# Altium PCB Widora-BIT3-NEO.PcbDoc
Units mil, origin at the board's own origin, x right, y up, seen from the top; angles counter-clockwise.
Board outline 3000 x 1400 mil, 2 copper layers (Top Layer, Bottom Layer), stack 56.8 mil thick; 76 components, 91 nets, 361 pads, 181 vias.
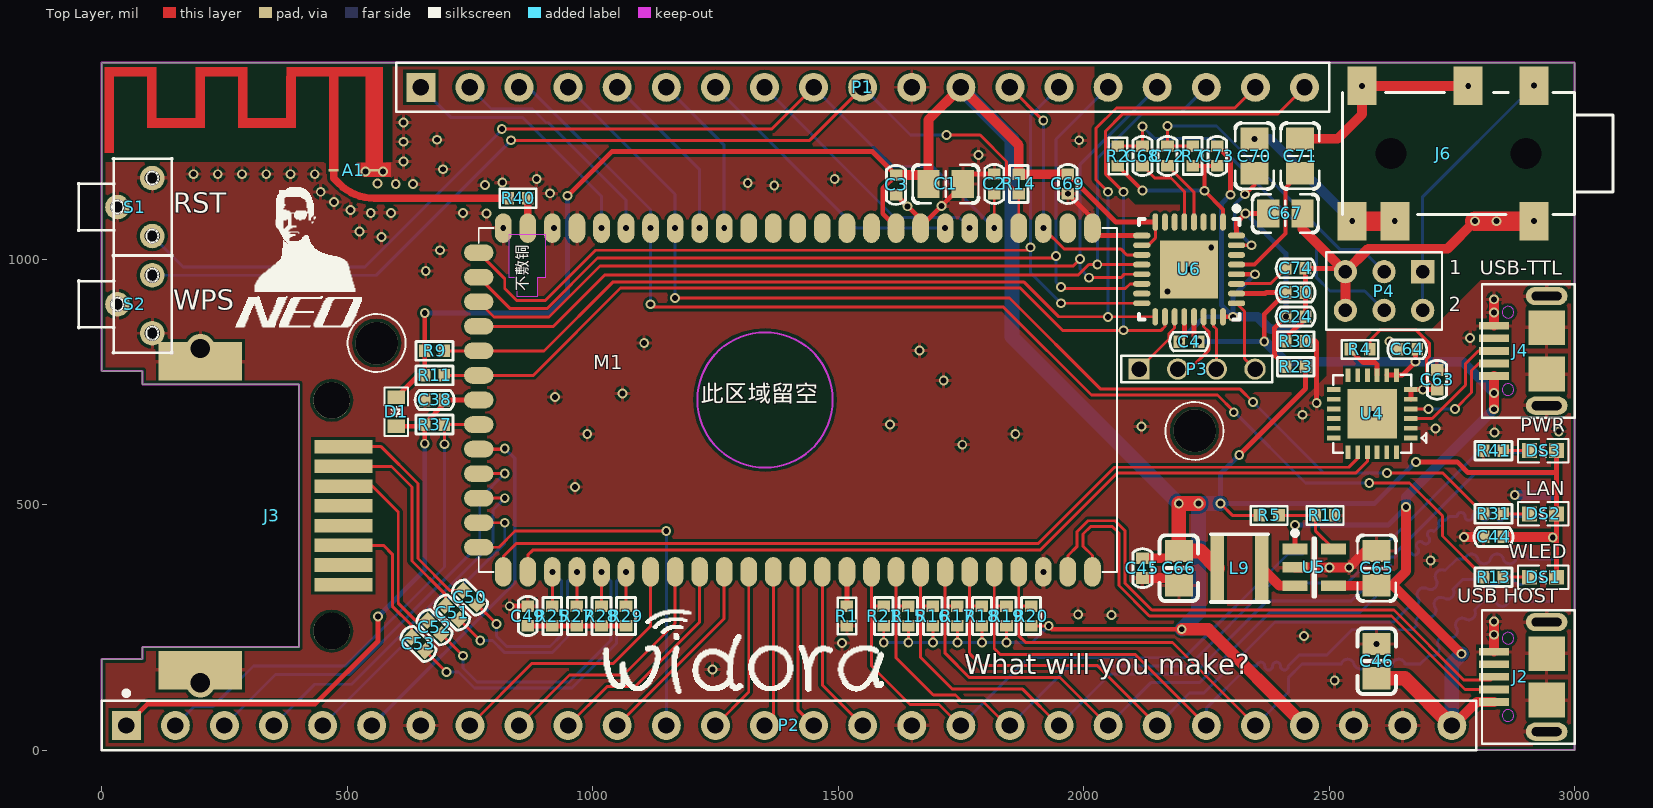
[diagram p0: Top Layer view]
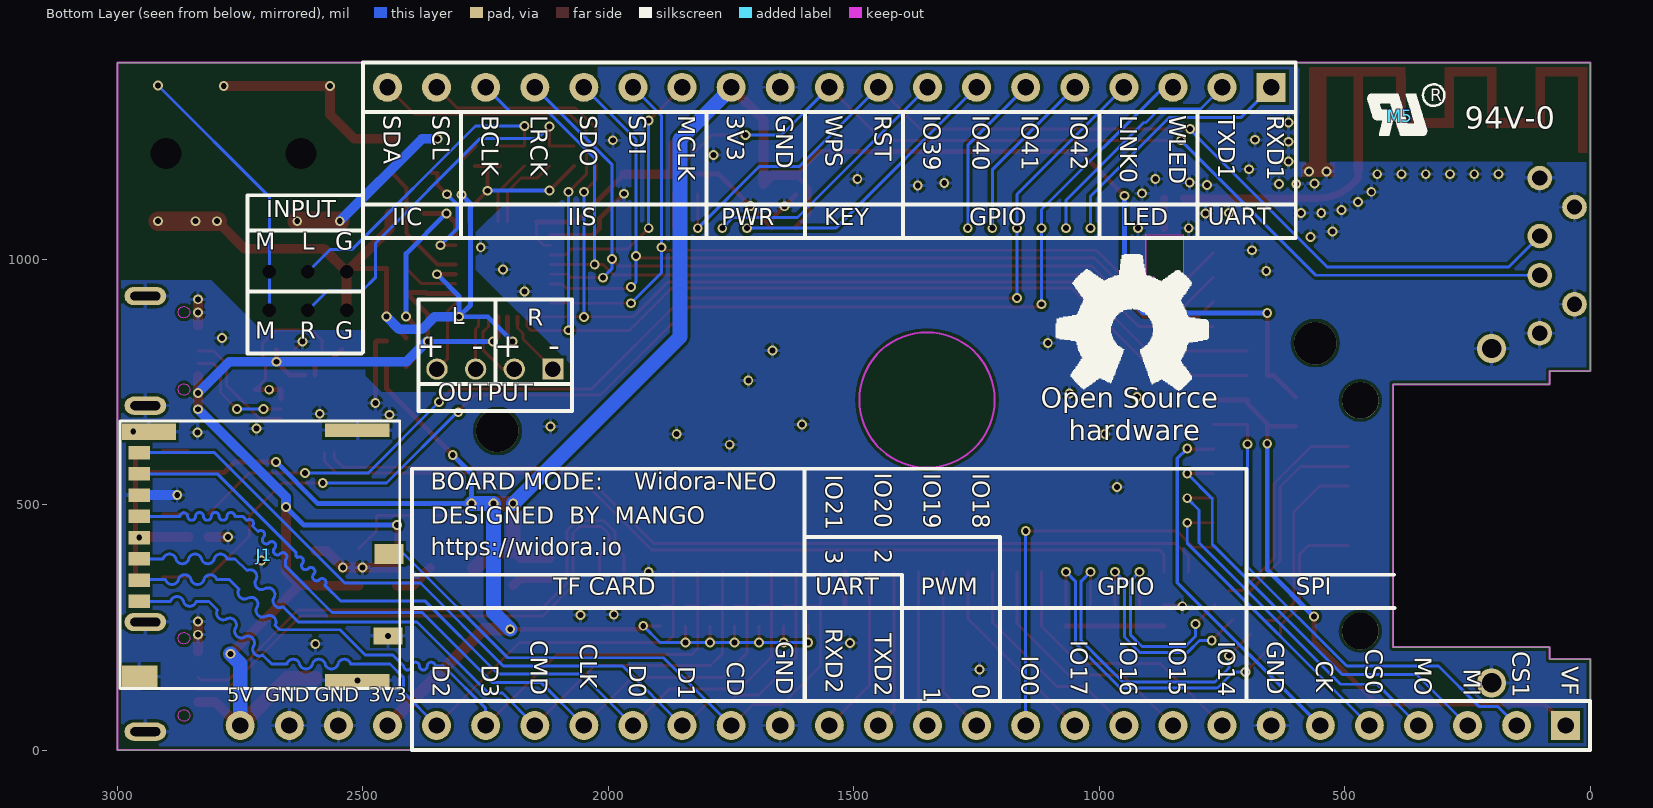
[diagram p1: Bottom Layer view, seen from below]
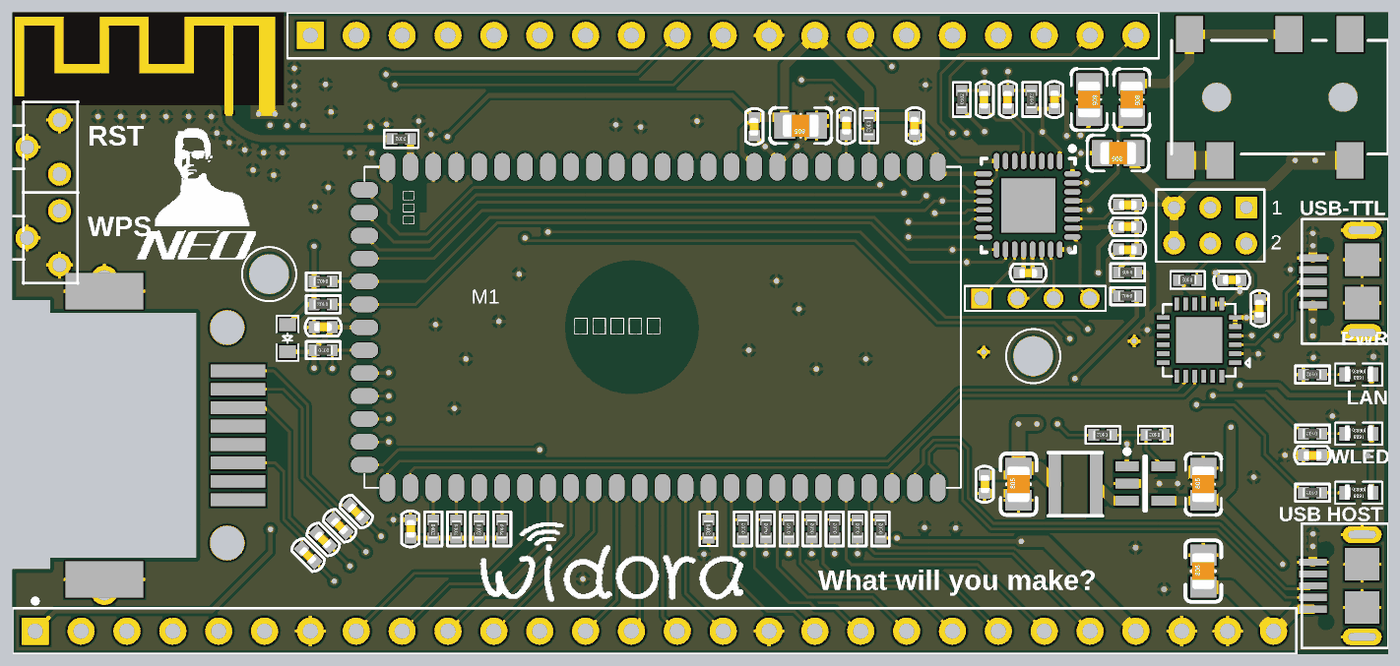
[diagram p2: 3D render of the assembled board from above, using the file's embedded part models]

## Layer stack, top to bottom
Top Solder: solder mask 0.4, Solder Resist, Dk 3.5
Top Layer: signal copper 1.4
Dielectric1: core 54, FR-4, Dk 4.8
Bottom Layer: signal copper 1.4
Bottom Solder: solder mask 0.4, Solder Resist, Dk 3.5

## Board outline
0,1400 3000,1400 3000,0 0,0 0,185 82.68,185 82.68,209.57 401.57,209.57 401.57,745 83,745 83,772 0,772 0,1400

## Design rules (kind name [scope] priority, off if disabled: settings)
Clearance Clearance_Polygon [InPolygon] p1: gap=6
Clearance [All] p2: gap=6
ComponentClearance [All] p1 off: gap=1 collisioncheckmode=3 verticalgap=1 showdistances=FALSE
DiffPairsRouting [All] p1: maxlimit=50 minlimit=6 mostfreqgap=6 toplayer_minwidth=15 toplayer_maxwidth=15 toplayer_prefwidth=15 bottomlayer_minwidth=15 bottomlayer_maxwidth=15 bottomlayer_prefwidth=15 maxuncoupledlength=3000
FabricationTestPointUsage TestPointUsage [All] p1 off: valid=0 allowmultiple=FALSE
FabricationTestpoint Testpoint [(IsPad And (OnTopLayer Or OnBottomLayer))] p1 off: side=3 testpointundercomponent=TRUE minsize=40 maxsize=100 preferedsize=60 minholesize=0 maxholesize=40 preferedholesize=32 testpointgrid=1 allowsidetop=TRUE allowsidebottom=TRUE usegrid=TRUE gridtolerance=0.01
HoleSize [All] p1: absolutevalues=TRUE maxlimit=150 minlimit=10 maxpercent=80.000 minpercent=20.000
MinimumSolderMaskSliver [All] p1 off: minsoldermaskwidth=1
PlaneClearance [All] p1: clearance=6
PlaneConnect PlaneConnect_isvia [IsVia] p1: planeconnectstyle=Direct reliefexpansion=20 reliefentries=4 reliefconductorwidth=20 reliefairgap=10
PlaneConnect [All] p2: planeconnectstyle=Direct reliefexpansion=20 reliefentries=4 reliefconductorwidth=25 reliefairgap=10
PolygonConnect [All] p1: connectstyle=Relief reliefconductorwidth=7 reliefentries=4 polygonreliefangle="90 Angle" airgapwidth=10
RoutingVias [All] p1: holewidth=12 width=24 viastyle="Through Hole" minholewidth=10 minwidth=20 maxholewidth=100 maxwidth=100
ShortCircuit [InNet('WIFI') vs InNet('GND')] p1: allowed=FALSE
SilkToSilkClearance [All] p1: silktosilkclearance=0
SilkToSolderMaskClearance SilkscreenOverComponentPads [IsPad] p1: minsilkscreentomaskgap=0 clearancetoexposedcopper=TRUE
SolderMaskExpansion [All] p1: expansion=4
Width [All] p1: maxlimit=100 minlimit=6 preferedwidth=6
19 further rules are at their usual default settings.

## Classes and differential pairs
differential pair RXI: +RXI_P -RXI_N
differential pair TXO: +TXO_P -TXO_N
differential pair UD: +UD_P -UD_N
differential pair U: +U_P -U_N

## Components (designator, comment, footprint, x,y, rotation, side; value= is the part's Value field where it differs from the comment)
A1 "WIFI天线 2.4G PCB板载" "2.4G - mirror" 555,1181.02 r0 top locked
C1 "10uF" 0805C 1719,1153 r180 top
C2 "0.1uF" C0402 1818,1153 r270 top
C3 "0.1uF" C0402 1618,1151 r90 top
C4 "0.1uF" C0402 2215,832 r180 top
C24 "0.1uF" C0402 2432,883 r180 top
C30 "0.1uF" C0402 2432,932 r0 top
C38 "0.1uF" C0402 678,713 r0 top
C44 "0.1uF" C0402 2835,434 r180 top
C45 "4.7uF" C0402 2120,370.5 r270 top
C46 "10uF" 0805C 2597,181 r90 top
C49 "0.1uF" C0402 868,273 r270 top
C50 "0.1uF" C0402 750,311 r135 top
C51 "0.1uF" C0402 714,280 r135 top
C52 "0.1uF" C0402 678,250 r135 top
C53 "0.1uF" C0402 645,216 r135 top
C63 "4.7uF" C0402 2720,754 r90 top
C64 "4.7uF" C0402 2659.37,816 r0 top
C65 "47uF" 0805C 2597,370.5 r90 top
C66 "47uF" 0805C 2194,370.5 r90 top
C67 "47uF" 0805C 2411,1093 r180 top
C68 "4.7uF" C0402 2120,1210 r90 top
C69 "0.1uF" C0402 1968,1153 r90 top
C70 "47uF" 0805C 2348,1210 r270 top
C71 "47uF" 0805C 2441,1210 r270 top
C72 "4.7uF" C0402 2171,1210 r90 top
C73 "4.7uF" C0402 2272,1210 r270 top
C74 "4.7uF" C0402 2432,981 r180 top
D1 "RB520S30 0603" SOD523 600,689 r270 top
DS1 "YELLOW LED 0603" LED0603 2936,352 r180 top
DS2 "BLUE LED 0603" LED0603 2936,480.95 r180 top
DS3 "RED LED 0603" LED0603 2936,609.91 r180 top
J1 "TF5033981892" TFCARD 2955,150 r90 bottom locked
J2 "MICRO_USB" MICROUSB 2906,149 r90 top locked
J3 "RJ45" RJ45 492.13,477.28 r270 top locked
J4 "MK5P microUSB" MICROUSB 2906,813 r90 top locked
J6 "PJ-311D" PJ311D 3000,1215 r180 top locked
L9 "3.3uH" VLS3012E 2318,371 r180 top
M1 "widora-bit" widora-core 768,363 r0 top locked
M5 "mark" ZY_UR-3X2 387,1291 r180 bottom
P1 "19PIN 2.54mm单排针" HDR1X19 650,1350 r0 top locked
P2 "Header 28" HDR1X28 50,50 r0 top locked
P3 "Header 4" "HDR1X4 -2.0" 2113,776 r0 top
P4 "Header 3X2" "HDR2X3 - 2.0" 2612,935 r180 top
R1 "50R" R0402 1518,273 r270 top
R2 "2K2" R0402 2070,1210 r90 top
R4 "5.1K" R0402 2563,816 r180 top
R5 "10K" R0402 2378,478 r180 top
R7 "2K2" R0402 2222,1210 r90 top
R9 "5.1K" R0402 678,813 r180 top
R10 "2K2" R0402 2492,478 r180 top
R11 "5.1K" R0402 678,763 r180 top
R13 "5.1K" R0402 2835,352 r180 top
R14 "5.1K" R0402 1868,1153 r270 top
R15 "10K" R0402 1643,273 r90 top
R16 "10K" R0402 1693,273 r90 top
R17 "10K" R0402 1743,273 r90 top
R18 "10K" R0402 1793,273 r90 top
R19 "10K" R0402 1843,273 r90 top
R20 "10K" R0402 1893,273 r90 top
R21 "10K" R0402 1593,273 r90 top
R23 "0R" R0402 2432,781 r180 top
R25 "50R" R0402 918,273 r270 top
R27 "50R" R0402 968,273 r270 top
R28 "50R" R0402 1018,273 r270 top
R29 "50R" R0402 1068,273 r270 top
R30 "0R" R0402 2432,833 r180 top
R31 "5.1K" R0402 2835,480.95 r180 top
R37 "NC" R0402 678,663 r0 top
R40 "0R" R0402 848,1124 r180 top
R41 "5.1K" R0402 2835,609.91 r180 top
S1 "SW-CE" KEY-A06 103,1047 r270 top
S2 "SW-CE" KEY-A06 103,849 r270 top
U4 "CP2104" QFN24 2588,685 r180 top
U5 "SY8008" SOT23-5 2470,372 r0 top locked
U6 "WM8960GEFL/RV" QFN50P500X500X100-33N 2215,979 r270 top locked

## Footprints (in the part's own frame and the unit in brackets; to place one, negate y for a bottom-side part, rotate by r counter-clockwise, add the part's x,y. Pads: shape width x height; smd on the part's side, far side on the other; paste and mask are expansions set on the pad)
"2.4G - mirror" [mil]
  rect 20x5 smd paste-39.37: 1(-82.68,0)
  rect 35.43x5 smd paste-39.37: 2(0,0)
  Top Layer region: 17.72,192.38 -17.72,192.38 -17.72,-2.5 17.72,-2.5
  Top Layer region: -72.83,192.38 -92.52,192.38 -92.52,-2.5 -72.83,-2.5
  Top Layer region: -529.53,192.38 -549.21,192.38 -549.21,35.29 -529.53,35.29
  Top Layer region: -442.91,210.13 -549.21,210.13 -549.21,190.44 -442.91,190.44
  Top Layer region: -442.91,192.38 -462.6,192.38 -462.6,86.48 -442.91,86.48
  Top Layer region: -362.2,106.16 -444.88,106.16 -444.88,86.48 -362.2,86.48
  Top Layer region: -344.49,192.38 -364.17,192.38 -364.17,86.48 -344.49,86.48
  Top Layer region: -257.87,210.13 -364.17,210.13 -364.17,190.44 -257.87,190.44
  Top Layer region: -257.87,192.38 -277.56,192.38 -277.56,86.48 -257.87,86.48
  Top Layer region: -177.16,106.19 -259.84,106.19 -259.84,86.5 -177.16,86.5
  Top Layer region: -159.45,192.38 -179.13,192.38 -179.13,86.48 -159.45,86.48
  Top Layer region: 17.74,210.09 -179.11,210.09 -179.11,190.41 17.74,190.41
0805C [mm]
  rect 1.15x1.45 smd: 1(-0.889,0) 2(0.889,0)
  silkscreen extent -1.7,-0.99 1.7,0.99, body extent -1,-0.63 1,0.63, height 0.78
C0402 [mm]
  rect 0.6x0.65 smd: 1(-0.508,0) 2(0.508,0)
  silkscreen extent -1.01,-0.48 1.01,0.48, body extent -0.51,-0.23 0.49,0.27, height 0.5
"HDR1X4 -2.0" [mm]
  rect 1.1x1.1 hole 0.8: 1(0,0)
  round 1.1 hole 0.8: 2(2,0) 3(4,0) 4(6,0)
  silkscreen extent -0.91,-0.69 6.88,0.69
HDR1X19 [mm]
  rect 1.5x1.5 hole 0.85: 1(0,0)
  round 1.5 hole 0.85: 2(2.54,0) 3(5.08,0) 4(7.62,0) 5(10.16,0) 6(12.7,0) 7(15.24,0) 8(17.78,0) 9(20.32,0) 10(22.86,0) 11(25.4,0) 12(27.94,0) 13(30.48,0) 14(33.02,0) 15(35.56,0) 16(38.1,0) 17(40.64,0) 18(43.18,0) 19(45.72,0)
  silkscreen extent -1.27,-1.27 46.99,1.27
HDR1X28 [mm]
  rect 1.5x1.5 hole 0.85: 1(0,0)
  round 1.5 hole 0.85: 2(2.54,0) 3(5.08,0) 4(7.62,0) 5(10.16,0) 6(12.7,0) 7(15.24,0) 8(17.78,0) 9(20.32,0) 10(22.86,0) 11(25.4,0) 12(27.94,0) 13(30.48,0) 14(33.02,0) 15(35.56,0) 16(38.1,0) 17(40.64,0) 18(43.18,0) 19(45.72,0) 20(48.26,0) 21(50.8,0) 22(53.34,0) 23(55.88,0) 24(58.42,0) 25(60.96,0) 26(63.5,0) 27(66.04,0) 28(68.58,0)
  silkscreen extent -1.27,-1.27 69.85,1.79
"HDR2X3 - 2.0" [mm]
  rect 1.2x1.2 / inner round 0 / far side round 0 hole 0.7: 1(-2,-1)
  round 1.2 / inner round 0 / far side round 0 hole 0.7: 2(-2,1) 3(0,-1) 4(0,1) 5(2,-1) 6(2,1)
  silkscreen extent -3,-2 3,2
KEY-A06 [mil]
  round 50 hole 31: 0(-59.05,-70.87) 1(0,0) 2(-118.11,0)
  silkscreen extent -159,-152 41,41
LED0603 [mil]
  rect 30x30 smd: A(-27.5,0) K(27.5,0)
  silkscreen extent -52,-24 52,24, body extent -31,-18 30,16, height 18
MICROUSB [mil] "MICROUSB"
  rect 15.75x60.31 smd: 1(-51.17,70.09) 2(-25.58,70.09) 3(0.01,70.09) 4(25.6,70.09) 5(51.19,70.09)
  oval 37x84.65 hole 17.72 slot 61.02 at 90 deg: 6(-111.6,-37.26) 7(111.62,-37.26)
  rect 70.87x74.8 smd: 8(-47.23,-37.26) 9(47.25,-37.26)
  Keep-Out Layer circle w1: c-78.73,41.48 r11.81
  Keep-Out Layer circle w1: c78.75,41.48 r11.81
  silkscreen extent -136,-94 136,94
PJ311D [mm] "PJ-311D"
  rect 1.5x2 smd: 1(2.1,-3.5) 2(2.1,3.5) 3(5.5,-3.5) 4(9.3,3.5) 5(11.5,3.5) 6(11,-3.5)
  round 1 hole 1.6: ""(2.5,0) ""(9.5,0)
  silkscreen extent -2,-3.15 12,3.15
QFN24 [mm]
  rect 0.7x0.25 smd: 1(-2,1.25) 2(-2,0.75) 3(-2,0.25) 4(-2,-0.25) 5(-2,-0.75) 6(-2,-1.25) 13(2,-1.25) 14(2,-0.75) 15(2,-0.25) 16(2,0.25) 17(2,0.75) 18(2,1.25)
  rect 0.25x0.7 smd: 7(-1.25,-2) 8(-0.75,-2) 9(-0.25,-2) 10(0.25,-2) 11(0.75,-2) 12(1.25,-2) 19(1.25,2) 20(0.75,2) 21(0.25,2) 22(-0.25,2) 23(-0.75,2) 24(-1.25,2)
  rect 2.55x2.55 smd: 25(0,0)
  silkscreen extent -2.79,-2.01 2.01,2.01
QFN50P500X500X100-33N [mm]
  oval 0.9x0.3 smd: 1(-2.45,1.75) 2(-2.45,1.25) 3(-2.45,0.75) 4(-2.45,0.25) 5(-2.45,-0.25) 6(-2.45,-0.75) 7(-2.45,-1.25) 8(-2.45,-1.75) 17(2.45,-1.75) 18(2.45,-1.25) 19(2.45,-0.75) 20(2.45,-0.25) 21(2.45,0.25) 22(2.45,0.75) 23(2.45,1.25) 24(2.45,1.75)
  oval 0.3x0.9 smd: 9(-1.75,-2.45) 10(-1.25,-2.45) 11(-0.75,-2.45) 12(-0.25,-2.45) 13(0.25,-2.45) 14(0.75,-2.45) 15(1.25,-2.45) 16(1.75,-2.45) 25(1.75,2.45) 26(1.25,2.45) 27(0.75,2.45) 28(0.25,2.45) 29(-0.25,2.45) 30(-0.75,2.45) 31(-1.25,2.45) 32(-1.75,2.45)
  rect 3x3 smd: 33(0,0)
  silkscreen extent -3.27,-2.6 2.6,2.6
R0402 [mm]
  rect 0.6x0.65 smd: 1(-0.508,0) 2(0.508,0)
  silkscreen extent -0.95,-0.48 0.95,0.48, body extent -0.47,-0.25 0.53,0.25, height 0.35
RJ45 [mm] "RJ45接口不带变压器"
  rect 0.7x3 smd: 1(-3.57,0) 2(-2.55,0) 3(-1.53,0) 4(-0.51,0) 5(0.51,0) 6(1.53,0) 7(2.55,0) 8(3.57,0)
  rect 2x4.3 smd: 9(-7.99,-7.4) 10(7.99,-7.4)
  round 1.9 hole 1.9: ""(-5.97,-0.6) ""(5.97,-0.6)
  Keep-Out Layer lines w0.1: 6.8,-10.4 6.8,-2.3 -6.8,-2.3 -6.8,-10.4
SOD523 [mm]
  rect 0.7x0.9 smd: A(-0.75,0) K(0.75,0)
  silkscreen extent -1.24,-0.61 1.24,0.61
SOT23-5 [mm] "SOT23, 5-Leads, Body 3.0x2.6mm (max), Pitch 0.95mm, IPC Medium Density"
  rect 1.3x0.55 smd: 1(-1,0.95) 2(-1,0) 3(-1,-0.95) 4(1,-0.95) 5(1,0.95)
  silkscreen extent -1.12,-1.5 0.05,1.9, body extent -0.7,-1.5 0.7,1.5, height 1.1
TFCARD [mm] "TFCARD"
  rect 0.7x1.1 smd: 1(3.88,0.015) 2(4.98,0.015) 3(6.08,0.015) 4(7.18,0.015) 5(8.28,0.015) 6(9.38,0.015) 7(10.48,0.015) 8(11.58,0.015)
  rect 1.14x1.83 smd: G1(0,0)
  rect 0.86x2.8 smd: G2(12.66,-0.485)
  rect 0.7x3.33 smd: G3(-0.22,-11.265) G4(12.74,-11.265)
  rect 0.9x1.5 smd: G5(2.09,-12.846)
  rect 1.05x1.5 smd: G6(6.33,-12.906)
  silkscreen extent -0.64,-13.46 13.21,1.02
VLS3012E [mil] "VLS3012E"
  rect 27.56x131.1 smd: 1(45.28,0.5) 2(-45.28,0.5)
  silkscreen extent -59,-68 59,70
widora-core [mil] "widora-core"
  oval 60x34 smd mask+2: A1(0,650) A2(0,600) A3(0,550) A4(0,500) A5(0,450) A6(0,400) A7(0,350) A8(0,300) A9(0,250) A10(0,200) A11(0,150) A12(0,100) A13(0,50)
  oval 34x60 smd mask+2: B1(50,0) B2(100,0) B3(150,0) B4(200,0) B5(250,0) B6(300,0) B7(350,0) B8(400,0) B9(450,0) B10(500,0) B11(550,0) B12(600,0) B13(650,0) B14(700,0) B15(750,0) B16(800,0) B17(850,0) B18(900,0) B19(950,0) B20(1000,0) B21(1050,0) B22(1100,0) B23(1150,0) B24(1200,0) B25(1250,0) C1(50,700) C2(100,700) C3(150,700) C4(200,700) C5(250,700) C6(300,700) C7(350,700) C8(400,700) C9(450,700) C10(500,700) C11(550,700) C12(600,700) C13(650,700) C14(700,700) C15(750,700) C16(800,700) C17(850,700) C18(900,700) C19(950,700) C20(1000,700) C21(1050,700) C22(1100,700) C23(1150,700) C24(1200,700) C25(1250,700)
  Keep-Out Layer circle w3.94: c583.13,350.13 r137.8
  Keep-Out Layer pour cut-out: 61.39,686.97 61.39,600.32 77.09,600.32 77.09,560.97 120.44,560.97 120.44,600.32 136.19,600.32 136.19,686.97
  silkscreen extent 0,0 1300,700
ZY_UR-3X2 [mil]
  silkscreen extent -67,-40 90,65

## Part data
A1: library part ANT2.4G
C1 C2 C3 C4 C24 C30 C38 C44 C45 C46 C49 C50 C51 C52 C53 C63 C64 C65 C66 C67 C68 C69 C70 C71 C72 C73 C74: library part CAP, "普通小电容"
D1: library part Diode, "普通二极管"
DS1 DS2 DS3: library part LED, "LED"
J3: "RJ45不带网络变压器"
J4: library part MICRO_USB, "4固定脚microUSB座"
L9: library part L, "普通电感"
P1: library part "Header 19", "Header, 19-Pin"
P2: "Header, 28-Pin"
P3: "Header, 4-Pin"
P4: "Header, 3-Pin, Dual row"
R1 R2 R4 R5 R7 R9 R10 R11 R13 R14 R15 R16 R17 R18 R19 R20 R21 R23 R25 R27 R28 R29 R30 R31 R37 R40 R41: library part RES, "普通电阻"
U5: library part MIC5219
U6: library part ATMEGA328P, "ATMEGA328p"

## Via types
v1: diameter 20, hole 12, Top Layer to Bottom Layer, tented both sides, 175 vias
v2: diameter 20, hole 12, Top Layer to Bottom Layer, 2 vias
v3: diameter 59.06, hole 39.37, Top Layer to Bottom Layer, 2 vias
v4: diameter 86.61, hole 86.61, Top Layer to Bottom Layer, tented both sides, 2 vias

## Nets (pads, with @x,y where several pads share a name; then routed paths per layer and width w, separated by ;. In a path a pad name is that pad's centre, name@x,y a point inside that pad or via, vN(x,y) a via of type N, cw(c..) or ccw(c..) an arc to the next point about the centre after c; other vN are vias at no path point)
3.3VD: C1.2 C3.2 C44.1 C45.1 C66.2 C69.2 D1.A DS1.A DS2.A DS3.A J1.4 L9.1 M1.C17 P1.12 P2.25 R5.2 R9.2 R11.2 R14.1 R15.1 R16.1 R17.1 R18.1 R19.1 R20.1 R21.1 R23.1 U6.8 U6.10 | length 6876
  Top Layer w6: v1(1593,219) R21.1 1593,232 ; v1(1643,219) R15.1 ; v1(1693,219) R16.1 ; v1(1743,219) R17.1 ; v1(1793,219) R18.1 ; v1(1843,219) R19.1 ; R20.1 v1(1929,253) ; U6.10 2131.75,1028.21 2146.1,1042.57 U6.8 ; v1(2279,502) 2303,478 R5.2
  Top Layer w10: D1.A 644.47,763 R11.2 R9.2 v1(658,890) ; v1(949,1129) 1039,1219 1570,1219 C3.2 ; M1.C17 1618,1065.6 1591,1092.6 1591,1144.16 1617.84,1171 C3.2 ; C3.2@1618.16,1171 C3.2 ; v1(1929,253) 1936,246 v1(2200,246) ; C69.2 1968.16,1173 1991.8,1149.37 ; 1991.8,1149.2 2065.54,1075.46 U6.8 ; v1(2317,601) 2452,736 R23.1 ; v1(2677,587) 2761,587 2783,565 2963.5,565 ; DS1.A DS2.A 2963.5,565 ; DS3.A 2963.5,565
  Top Layer w20: C3.2 1666,1171 C1.2 1684,1284 P1.12 1868,1232 R14.1 C69.2 ; C45.1 2179,390.5 C66.2 ; C44.1 v1@2954.27,434
  Top Layer w25: v1(2200,246) 2254,246 P2.25
  Top Layer w30: v1(2234,502) v1(2194,502) C66.2 2237.72,405.5 L9.1
  Bottom Layer w6: v1(1593,219) v1(1643,219) v1(1693,219) v1(1743,219) v1(1793,219) v1(1843,219) 1895,219 v1(1929,253)
  Bottom Layer w10: v1(658,890) 910,890 949,929 v1(949,1129) ; v1(2317,601) 2279,563 v1(2279,502) 2592,502 v1(2677,587)
  Bottom Layer w20: P1.12@1749,1349 P1.12
  Bottom Layer w30: P1.12 1750,1348 1854,1244 1854,842 v1(2194,502) ; v1(2200,246) 2234,280 v1(2234,502) v1(2279,502)
  other v1: 2955.59,432.68
5V: C4.1 C30.1 C46.1 C64.2 C65.1 J2.1 J4.1 P2.28 U4.7 U4.8 U5.1 U5.4 U6.21 U6.26 | length 2581.6
  Top Layer w10: U6.21 2224.84,842.16 v1(2235,832) ; U6.26 2370,929.79 2372.21,932 C30.1 ; v1(2368,832) 2368,888 C30.1@2409.79,929.79 ; U5.1 v1(2430.63,458.37) ; U4.8 U4.7 2649.11,763.74 v1(2676.37,791) C64.2@2676.37,816
  Top Layer w20: U5.4 C65.1@2596.1,334.6 ; C65.1 2628.5,335.5 ; v1(2657,495) 2657,364 2628.5,335.5 ; P2.28 2753,50 2800.83,97.83 J2.1 ; v1(2770,196) 2630.5,335.5 2628.5,335.5 ; v1(2835.91,694.09) v1(2835.91,727) J4.1
  Top Layer w30: C46.1 2654,146 P2.28
  Bottom Layer w10: v1(2235,832) v1(2368,832) ; v1(2430.63,458.37) 2620.37,458.37 v1(2657,495)
  Bottom Layer w20: v1@2370,832 2411,791 v1(2676.37,791) 2771.65,791 v1@2835.65,727 ; v1(2657,495) 2657,515.18 v1(2835.91,694.09)
  Bottom Layer w30: P2.28 2750,176 v1(2770,196)
A3.3V: C24.2 C67.2 R23.2 U6.32 | length 464.6
  Top Layer w10: U6.32 2311.46,1074.46 v1(2330,1093) C67.2 ; R23.2 2389.19,803.81 2389.19,860.19 v1(2412,883)
  Bottom Layer w10: v1(2330,1093) 2412,1011 v1@2412,882
AGND: C4.2 C24.1 C30.2 C67.1 C73.1 C74.1 J6.2 P4.5 P4.6 R30.2 U6.20 U6.24 U6.28 | length 1782.8
  Top Layer w10: v1(2195,832) 2205.16,842.16 U6.20 ; C73.1 2272.16,1230 2299,1203.16 v1(2299,1131) ; U6.24 v1(2304.63,882.54) ; U6.28 v1(2349,969.16) ; R30.2@2412,839.61 C24.1@2452,879.61 ; v1(2452,883) C30.2 C74.1 ; C74.1@2452,981.16 C74.1 ; P4.5@2526.63,981 C74.1
  Top Layer w20: C67.1 2446,1061.63 2526.63,981 P4.5 ; P4.6 P4.5 ; v1(2797.2,1077.2) 2741,1021 2579.89,1021 P4.5
  Top Layer w40: v1(2797.2,1077.2) v1(2841,1077.2) v1(2917.32,1077.2)
  Bottom Layer w10: v1(2195,832) 2245.54,882.54 v1(2304.63,882.54) ; v1(2299,1131) 2281,1113 2281,906.17 v1(2304.63,882.54) ; v1(2349,969.16) 2304.63,924.79 v1(2304.63,882.54)
  Bottom Layer w20: v1(2304.63,882.54) 2354.46,882.54 2379,858 2380.77,858 2381.77,857 2426,857 v1(2452,883)
BIAS: C73.2 R2.1 R7.1 U6.1 | length 377.2
  Top Layer w8: R2.1 v1(2120,1140) ; R7.1 2246,1190 ; C73.2 2246,1190 ; U6.1 2284.21,1075.77 2284.21,1101 v1(2246,1139.21) 2246,1190
  Bottom Layer w8: v1(2120,1140) v1@2246,1140
CPURST_N: C2.2 M1.C21 P1.9 S1.1 | length 2082.7
  Top Layer w6: v1(815,1265) 1365,1265 P1.9 ; v1(1818,1063) C2.2
  Bottom Layer w6: S1.1 166,984 535.87,984 815,1263.13 v1(815,1265) ; P1.9 1611,1189 1692,1189 v1(1818,1063)
GND: A1.2 C1.1 C2.1 C3.1 C38.1 C44.2 C45.2 C46.2 C49.1 C63.2 C64.1 C65.2 C66.1 C69.1 J1.6 J1.G1 J1.G2 J1.G3 J1.G4 J1.G5 J2.5 J2.6 J2.7 J2.8 J2.9 J3.9 J3.10 J4.5 J4.6 J4.7 J4.8 J4.9 M1.B23 M1.C1 M1.C3 M1.C4 M1.C18 M1.C25 P1.11 P2.7 P2.17 P2.26 P2.27 R1.2 R10.1 R30.1 R41.2 S1.0 S1.2 S2.0 S2.1 U4.2 U4.25 U5.2 U6.9 U6.33 | length 1181.7
  Top Layer w6: v1(2623.37,832) C64.1
  Top Layer w10: v1(831,293) C49.1 ; C3.1 1668,1081 M1.C18@1668,1065.6 ; M1.C18 M1.C18@1668,1065.6 ; C2.1 1775.4,1173 1755.4,1153 C1.1 1754,1151.6 M1.C18@1668,1065.6 ; v1(1968,1133) 2018,1083 M1.C25 2033.1,1047.9 U6.9 ; R30.1 2472,833 2474.81,830.19 v1(2474.81,707.19)
  Top Layer w20: C45.2 2179,350.5 C66.1 ; U5.2 v1(2501,372) v1(2541,372) 2574.5,405.5 C65.2 ; v1(2775,434) C44.2 ; J2.5 v1(2835.91,262.09) ; J4.5 v1(2835.91,918.09)
  Bottom Layer w20: v1(2878.29,519.29) J1.6
  other v1: 2511.5,141.34 1244,164 2597,216 1508,218 2449.25,232.28 2835.91,235 2057,275 1989,276 1918,363 2707,386 964,536 1753,622 989,644 1861,644 2837,647 2968,649 2717,655 1606,663 2588,685 923,719 1061,726 1715,753 1666,814 1105,829 2787,839 2835.91,891 2171,934 660,976 2215,979 689,1018 2260,1024 570,1045 525,1056 818,1063 921.5,1062.99 784,1093 548,1094 589,1094 736,1094 507,1100 1641.53,1107.47 1710.85,1108.45 473,1116 913,1134 446,1137 1370,1150 781,1151 599,1153 634,1153 562,1154 1316,1155 816,1156 886,1163 1493,1163 187,1173 236.4,1173 285.8,1173 335.2,1173 384.6,1173 434,1173 537.28,1178.52 572.69,1178.53 695,1183 615,1199 1786,1212 615,1239 1991,1242 683,1243 615,1278
  other v2: 2118,659 2446,683
  other v3: 200.79,136.73 200.79,817.84
GPIO14: M1.B7 P2.8 | length 562.7
  Top Layer w6: P2.8 876,176 1042,176 1118,252 M1.B7
GPIO15: M1.B8 P2.9 | length 509.2
  Top Layer w6: P2.9 953,153 1063,153 1168,258 M1.B8
GPIO16: M1.B9 P2.10 | length 457.4
  Top Layer w6: P2.10 1029,129 1086,129 1218,261 M1.B9
GPIO17: M1.B10 P2.11 | length 403.3
  Top Layer w6: P2.11 1268,268 M1.B10
GPIO39: M1.C20 P1.8 | length 536.9
  Bottom Layer w6: P1.8 1615,1085 1746,1085 v1(1768,1063)
GPIO40: M1.C19 P1.7 | length 586.9
  Bottom Layer w6: P1.7 1537,1063 v1(1718,1063)
GPIO41: M1.C10 P1.6 | length 335.9
  Bottom Layer w6: P1.6 1268,1232 v1(1268,1063)
GPIO42: M1.C9 P1.5 | length 356.6
  Bottom Layer w6: P1.5 1218,1182 v1(1218,1063)
GPIO_0: M1.A13 P2.12 | length 791.7
  Top Layer w6: M1.A13 809,413 842,446 v1(1150,446)
  Bottom Layer w6: P2.12 v1(1150,446)
I2C_SCLK: M1.A5 P1.18 R9.1 U6.17 | length 2289.4
  Top Layer w6: R9.1 M1.A5 901,813 1041,953 1879,953 1949.46,882.54 U6.17 ; v1(2050,1137) 2025,1162 2025,1266 2067,1308 2308,1308 P1.18
  Bottom Layer w6: v1(2050,882) v1(2050,1137)
I2C_SD: M1.A6 P1.19 R11.1 U6.18 | length 2462.9
  Top Layer w6: R11.1 M1.A6 879,763 1057,941 1871,941 1957,855 2158,855 2165.79,862.79 U6.18 ; v1(2081,1137) 2045,1173 2045,1261 2079,1295 2395,1295 P1.19
  Bottom Layer w6: v1(2081,855) v1(2081,1137)
I2S_CLK: M1.A4 P1.17 U6.12 | length 1900.9
  Top Layer w6: M1.A4 920,863 1025,968 1989.87,968 2010.71,988.84 v1(2028,988.84) U6.12
  Bottom Layer w6: v1(2028,988.84) 2028,1205 2122,1299 2199,1299 P1.17
I2S_SDI: M1.A1 P1.14 U6.16 | length 1877.1
  Top Layer w6: M1.A1 821,960 821,940.06 845.06,916 904,916 1006,1018 1890,1018 1892,1020 v1(1892,1024) ; v1(1953.9,910.1) U6.16
  Bottom Layer w6: P1.14 1892,1292 v1(1892,1024) 1892,972 v1(1953.9,910.1)
I2S_SDO: M1.A2 P1.15 U6.14 | length 1867.3
  Top Layer w6: M1.A2 832,899 907,899 1010,1002 1926,1002 1940,1002 v1(1944,1006) ; v1@1957,940 2085,940 2094.47,949.47 U6.14
  Bottom Layer w6: v1(1954,943) 1944,953 v1(1944,1006) 1944,1244 P1.15
I2S_WS: M1.A3 P1.16 U6.13 | length 1857.4
  Top Layer w6: M1.A3 799,882 911,882 1015,986 1975,986 1979,986 v1(1993,1000) ; v1(2011.16,962.16) 2076,962.16 2083,969.16 U6.13
  Bottom Layer w6: v1(2011.16,962.16) 1993,980.32 v1(1993,1000) 1993,1193 P1.16
LINK0: M1.C8 P1.4 R31.2 | length 2348.6
  Top Layer w6: v1(1168,921) 1849,921 2035,735 2319,735 v1(2345,709) ; v1(2618,564) 2731.95,564 R31.2
  Bottom Layer w6: P1.4 1168,1132 v1(1168,1063) v1(1168,921) ; v1(2345,709) 2490,564 v1(2618,564)
LN: P3.3 U6.23 | length 109.1
  Top Layer w6: U6.23 2264.21,863.79 2270.48,857.52 P3.3
LOUT: C70.1 J6.4 J6.5 | length 364.6
  Top Layer w10: J6.5@2542,1073.2 J6.5@2547.24,1073.2
  Top Layer w20: J6.5@2547.24,1073.2 v1(2547.24,1077.2)
  Top Layer w40: v1(2547.24,1077.2) v1(2633.86,1077.2)
  Bottom Layer w20: v1(2348,1245) 2379.45,1245 v1(2547.24,1077.2)
LP: P3.4 U6.25 | length 149.7
  Top Layer w6: U6.25 2328,893.56 2328,797.22 2349,776.22 P3.4
MIC: J6.1 P4.1 P4.2 | length 552
  Bottom Layer w6: P4.2 P4.1 2690.74,1099 2690.74,1127.21 v1(2917.32,1353.8)
MICINL: C72.2 P4.3 R7.2 | length 655.9
  Top Layer w6: v1(2171,1271) C72.2 R7.2
  Bottom Layer w6: v1(2171,1271) 2271,1271 2522,1020 2566.37,1020 P4.3
MICINR: C68.2 P4.4 R2.2 | length 778.1
  Top Layer w6: R2.2 C68.2 v1(2120,1270)
  Bottom Layer w6: v1(2120,1270) 2144,1246 2261,1246 2474,1033 2474,963 2502,935 2572.63,935 P4.4
NetC63_1: C63.1 R4.1 U4.5 U4.6 | length 339.1
  Top Layer w6: R4.1 2583,834 2605,856 2676.7,856 2705,827.7 2705,803 2698.2,796.2 2698.2,755.8 2719.79,734.21 C63.1
  Top Layer w10: U4.5 U4.6 C63.1@2719.79,734.21
  other v1: 2691,734
NetC68_1: C68.1 U6.5 | length 169.1
  Top Layer w6: C68.1 2145,1165 2178,1165 2205.16,1137.84 U6.5
NetC70_2: C70.2 U6.31 | length 219.3
  Top Layer w8: U6.31 v1(2342,1028.21) ; v1(2329,1132) 2348,1151 C70.2 C70.2@2359.32,1175
  Bottom Layer w8: v1(2329,1132) 2308,1111 2308,1062.21 v1(2342,1028.21)
NetC71_2: C71.2 U6.29 | length 261.1
  Top Layer w8: U6.29 2311.77,989.16 2348.16,989.16 2411,1052 2411,1145 C71.2
NetC72_1: C72.1 U6.4 | length 136.8
  Top Layer w6: C72.1 2224.84,1136.16 U6.4
NetC74_2: C74.2 U6.27 | length 113.6
  Top Layer w6: U6.27 2311.98,950 2381,950 C74.2
NetDS1_K: DS1.K R13.1 | length 53.5
  Top Layer w6: R13.1 DS1.K
NetDS2_K: DS2.K R31.1 | length 53.5
  Top Layer w6: R31.1 DS2.K
NetDS3_K: DS3.K R41.1 | length 53.5
  Top Layer w6: R41.1 DS3.K
NetL9_2: L9.2 U5.3 | length 82.2
  Top Layer w20: L9.2 2399.18,334.6 U5.3
NetR4_2: R4.2 U4.9 | length 89.1
  Top Layer w10: R4.2 2543,815.84 2569.84,789 2594,789 2597.84,785.16 U4.9
NetR5_1: R5.1 R10.2 U5.5 | length 158.1
  Top Layer w6: R5.1 R10.2 2472,446.77 U5.5
NETREF: C49.2 R25.2 R27.2 R28.2 R29.2 | length 200
  Top Layer w10: C49.2 R27.2 R29.2
PCIE_CKN0: M1.C12
PCIE_CKP0: M1.C11
PCIE_RXN0: M1.C13
PCIE_RXP0: M1.C14
PCIE_TXN0: M1.C16
PCIE_TXP0: M1.C15
PERST_N: M1.C24
PWM_CH0: M1.B11 P2.13 | length 341.2
  Top Layer w6: P2.13 1318,118 M1.B11
PWM_CH1: M1.B12 P2.14 | length 320.5
  Top Layer w6: P2.14 1368,68 M1.B12
REF_CLK: M1.C23 P1.13 U6.11 | length 538.3
  Top Layer w6: P1.13 v1(1918,1282) ; v1(1918,1063) 1960,1021 2075.53,1021 2088,1008.53 U6.11
  Bottom Layer w6: v1(1918,1063) v1(1918,1282)
RF: M1.C2 R40.1 | length 61
  Top Layer w15: M1.C2 R40.1
RN: P3.1 U6.19 | length 151.2
  Top Layer w6: P3.1 2174.19,837.19 2174.19,848.52 2185.47,859.81 U6.19
  Top Layer w8: U6.19@2185.47,867.92 U6.19
ROUT: C71.1 J6.3 J6.6 | length 429
  Top Layer w20: C71.1@2433,1245 2517,1245 2566.93,1294.93 v1(2566.93,1352.8) v1(2783.46,1352.8)
RP: P3.2 U6.22 | length 152.2
  Top Layer w6: P3.2 2216.33,776 2255.81,815.48 2255.81,851.19 2244.53,862.47 U6.22
RX+: C52.2 J3.3 | length 393.9
  Top Layer w6: J3.3 551.48,537.52 604,485 604,299 638.86,264.14 C52.2
RX-: C53.2 J3.6 | length 292.3
  Top Layer w6: J3.6 573.95,417.05 592,399 592,293 630.86,254.14 C53.2
RXD2/PWM3: M1.B14 P2.16 | length 347
  Top Layer w6: M1.B14 1468,132 P2.16
RXI_N: C51.1 M1.B4 R27.1 | length 472.2
  Top Layer w6: C51.1 v1(771,223) ; R27.1 v1(968,363)
  Bottom Layer w6: v1(771,223) 796.02,223 820.02,198.99 917.97,198.99 949,230.03 949,344 v1(968,363)
RXI_P: C50.1 M1.B3 R25.1 | length 438.9
  Top Layer w6: C50.1 v1(804,257) ; R25.1 v1(918,363)
  Bottom Layer w6: v1(804,257) 804,231.99 824.99,210.99 912.99,210.99 937,235 937,344 v1(918,363)
SD_CD: J1.G6 M1.B16 P2.18 R21.2 | length 1290.7
  Top Layer w6: M1.B16 1568,293 ; R21.2 1568,293 ; P2.18 1748.13,50 1705.66,92.47 1646.53,92.47 1568,171 1568,293
  Bottom Layer w6: P2.18 1888,188 2205,188 2416.21,399.21 J1.G6
SD_CLK: J1.5 M1.B19 P2.21 R17.2 | length 1791.7
  Top Layer w6: M1.B19 1718,293 ; R17.2 1718,293 ; P2.21 1952,148 1767,148 1718,197 1718,293
  Bottom Layer w6: P2.21 2138,138 2237,138 2379,280 2563,280 2657.34,374.34 2657.34,388.34 cw(c2663,394) 2668.66,399.66 ccw(c2674.31,405.31) 2679.97,410.97 cw(c2685.63,416.63) 2691.28,422.28 ccw(c2696.94,427.94) 2702.6,433.6 cw(c2708.25,439.25) 2713.91,444.91 2725.22,456.22 cw(c2730.88,461.88) 2736.54,467.54 2744.98,475.98 2760.98,475.98 cw(c2768.98,475.98) 2776.98,475.98 ccw(c2784.98,475.98) 2792.98,475.98 cw(c2800.98,475.98) 2808.98,475.98 ccw(c2816.98,475.98) 2824.98,475.98 cw(c2832.98,475.98) 2840.98,475.98 ccw(c2848.98,475.98) 2856.98,475.98 cw(c2864.98,475.39) 2872.98,475.98 J1.5
SD_CMD: J1.3 M1.B20 P2.22 R18.2 | length 1664.1
  Top Layer w6: M1.B20 1768,293 ; R18.2 1768,293 ; P2.22 2057.96,142.04 2028,172 1792,172 1768,196 1768,293
  Bottom Layer w6: P2.22 2216,116 2245,116 2390,261 2632,261 2662.88,291.88 ccw(c2669.63,303.51) 2681.27,310.27 cw(c2692.9,317.02) 2699.65,328.65 ccw(c2706.4,340.28) 2718.04,347.04 cw(c2729.67,353.79) 2736.42,365.42 2760.37,389.37 2777,389.37 cw(c2790,385.92) 2803,389.37 ccw(c2816,392.82) 2829,389.37 cw(c2842,385.92) 2855,389.37 ccw(c2868,392.82) 2881,389.37 cw(c2894,385.92) 2907,389.37 J1.3
SD_D0: J1.7 M1.B18 P2.20 R16.2 | length 1804.3
  Top Layer w6: M1.B18 1668,293 ; R16.2 1668,293 ; P2.20 1876,124 1733,124 1668,189 1668,293
  Bottom Layer w6: P2.20 2055,155 2225,155 2374,304 2546,304 2577.62,335.62 cw(c2583.28,341.28) 2588.94,346.94 ccw(c2594.59,352.59) 2600.25,358.25 cw(c2605.91,363.91) 2611.56,369.56 ccw(c2617.22,375.22) 2622.88,380.88 cw(c2629.58,385.49) 2634.19,392.19 2636,394 2636,402 2796.6,562.6 J1.7
SD_D1: J1.8 M1.B17 P2.19 R15.2 | length 1824
  Top Layer w6: M1.B17 1618,188 1694,112 1739,112 1751,100 1794,100 1844,50 P2.19 ; 1619,293 R15.2
  Bottom Layer w6: P2.19 1971,171 2214,171 2383,340 2537,340 2802.91,605.91 J1.8
SD_D2: J1.1 M1.B22 P2.24 R20.2 | length 1551
  Top Layer w6: M1.B22 1868,233 1882,219 2181,219 P2.24 ; 1869,293 R20.2
  Bottom Layer w6: P2.24 2417,117 2417,147 2445,175 2525,175 cw(c2538,171.55) 2551,175 ccw(c2564,178.45) 2577,175 cw(c2590,171.55) 2603,175 ccw(c2616,178.45) 2629,175 cw(c2642,171.55) 2655,175 2681,175 2686,175 2704.38,193.38 ccw(c2711.14,205.02) 2722.77,211.77 cw(c2734.4,218.52) 2741.15,230.15 ccw(c2747.91,241.79) 2759.54,248.54 cw(c2771.17,255.29) 2777.92,266.92 ccw(c2784.68,278.56) 2796.31,285.31 2813.76,302.76 2839.76,302.76 ccw(c2852.76,306.21) 2865.76,302.76 cw(c2878.76,299.31) 2891.76,302.76 2915,302.76 J1.1
SD_D3: J1.2 M1.B21 P2.23 R19.2 | length 1638.3
  Top Layer w6: M1.B21 1818,293 ; R19.2 1818,293 ; P2.23 2105,195 1830,195 1818,207 1818,293
  Bottom Layer w6: P2.23 2250,85 2336,171 2353,171 cw(c2361,171) 2369,171 ccw(c2377,171) 2385,171 cw(c2393,171) 2401,171 ccw(c2409,171) 2417,171 2440,194 2496,194 2547,245 2670,245 2679.12,254.12 cw(c2690.75,260.87) 2697.5,272.5 ccw(c2704.26,284.14) 2715.89,290.89 cw(c2727.52,297.64) 2734.27,309.27 ccw(c2741.03,320.91) 2752.66,327.66 2772,347 2798,347 cw(c2811,343.55) 2824,347 ccw(c2837,350.45) 2850,347 cw(c2863,343.55) 2876,347 ccw(c2889,350.45) 2902,347 2954.65,347 J1.2
SD_WP: M1.B15 R1.1 | length 70
  Top Layer w10: R1.1 M1.B15
SPI_CLK: M1.A9 P2.6 | length 745.8
  Top Layer w7: M1.A9 v1@821,613
  Bottom Layer w7: P2.6 841,341 841,594 v1(821,614)
SPI_CS0: M1.A12 P2.5 | length 619.7
  Top Layer w6: M1.A12 v1(821,463)
  Bottom Layer w6: P2.5 821,421 v1(821,463)
SPI_CS1: M1.A8 P2.2 R37.2 | length 1041.8
  Top Layer w6: v1(698,623) R37.2 M1.A8
  Bottom Layer w6: P2.2 189,89 227,89 309,171 496,171 698,373 v1(698,623)
SPI_MISO: M1.A10 P2.3 | length 891
  Top Layer w6: M1.A10 v1(821,563)
  Bottom Layer w6: P2.3 354,154 505,154 770,419 770,512 v1(821,563)
SPI_MOSI: M1.A11 P2.4 | length 755
  Top Layer w6: M1.A11 v1(821,513)
  Bottom Layer w6: P2.4 434,134 509,134 797,422 797,489 v1(821,513)
TX+: C50.2 J3.1 | length 454.6
  Top Layer w6: J3.1 569.16,617.84 644,543 644,390 708.86,325.14 C50.2
TX-: C51.2 J3.2 | length 427.1
  Top Layer w6: J3.2 590.32,577.68 632,536 632,385.03 699.86,317.17 C51.2
TXD2/PWM2: M1.B13 P2.15 | length 326.3
  Top Layer w6: M1.B13 1418,82 P2.15
TXO_N: C53.1 M1.B6 R29.1 | length 681.8
  Top Layer w6: C53.1 v1(702,159) ; R29.1 v1(1068,363)
  Bottom Layer w6: v1(702,159) 727.02,159 759.52,126.49 957.47,126.49 1001.49,170.51 1049,218.03 1049,344 v1(1068,363)
TXO_P: C52.1 M1.B5 R28.1 | length 652.7
  Top Layer w6: C52.1 v1(736,192) ; R28.1 v1(1018,363)
  Bottom Layer w6: v1(736,192) 736,166.99 764.49,138.49 952.49,138.49 993,179 1037,223 1037,344 v1(1018,363)
U_N: J4.2 U4.4 | length 233.7
  Top Layer w6: U4.4 v1(2702.84,694.84) ; v1(2756.84,694.84) 2790.42,728.42 2790.42,773.1 2804.74,787.42 J4.2
  Bottom Layer w6: v1(2702.84,694.84) v1(2756.84,694.84)
U_P: J4.3 U4.3 | length 252
  Top Layer w6: U4.3 2710.03,675.16 2778,743.13 2778,787 2804.01,813.01 J4.3
UART_RXD0: M1.B2 U4.21 | length 1841.4
  Top Layer w6: M1.B2 868,397 878,407 1911,407 2068,564 2554,564 2578.16,588.16 U4.21
UART_RXD1: M1.C5 P1.1 | length 525
  Bottom Layer w6: P1.1 712,1288 858,1288 1018,1128 v1(1018,1063)
UART_TXD0: M1.B1 U4.20 | length 1866.3
  Top Layer w6: M1.B1 818,394 845,421 1908.03,421 2063.03,576 2539.96,576 2558.47,594.51 U4.20
UART_TXD1: M1.C6 P1.2 | length 466
  Bottom Layer w6: P1.2 794,1306 877.74,1306 905.24,1278.5 ; 909.5,1278.5 1068,1120 v1(1068,1063)
UD_N: J2.2 M1.B25 | length 1128
  Top Layer w6: M1.B25 2018,396.02 1999,415.02 1999,440 2014,455 2059,455 2072,442 2072,335 2134,273 2627.24,273 2776.82,123.42 J2.2
UD_P: J2.3 M1.B24 | length 1147.9
  Top Layer w6: M1.B24 1968,396.02 1987,415.02 1987,440 1987,444.97 2009.03,467 2063.97,467 2084,446.97 2084,339.97 2138.97,285 2632.22,285 2775,142.22 2829.11,142.22 J2.3
VDD_FLASH: C38.2 D1.K M1.A7 P2.1 R37.1 | length 1255.6
  Top Layer w10: P2.1 94,94 435,94 563,222 v1(563,272) ; D1.K R37.1@654.47,659.47 ; v1(658,624) R37.1 658,665 698,705 C38.2 M1.A7
  Bottom Layer w10: v1(563,272) 658,367 v1(658,624)
WIFI: A1.1 R40.2 | length 384.4
  Top Layer w15: A1.1 472.32,1165.02 484.05,1153.29 ccw(c554.76,1224) 554.76,1124 R40.2
WLED_N: M1.C7 P1.3 R13.2 | length 2516.6
  Top Layer w6: v1(1118,908) 1124,902 1837,902 2016,723 2273,723 2306,690 v1(2306,688) ; v1(2582,544) 2664,544 2731,477 2731,436 R13.2
  Bottom Layer w6: P1.3 869,1350 1118,1101 v1(1118,1063) v1(1118,908) ; v1(2306,688) 2308,688 2452,544 v1(2582,544)
WPS_RST_PBC: M1.C22 P1.10 R14.2 S2.2 | length 2107.5
  Top Layer w6: v1(834,1242) 1442,1242 P1.10 ; v1(1720.67,1252.67) 1789.33,1252.67 1843,1199 1843,1158 R14.2 M1.C22
  Bottom Layer w6: S2.2 559.11,967.11 v1(834,1242) ; P1.10 1647.33,1252.67 v1(1720.67,1252.67)
pads on no net: J2.4 J3. J3.4 J3.5 J3.7 J3.8 J4.4 J6. U4.1 U4.10 U4.11 U4.12 U4.13 U4.14 U4.15 U4.16 U4.17 U4.18 U4.19 U4.22 U4.23 U4.24 U6.2 U6.3 U6.6 U6.7 U6.15 U6.30
copper on no net:
  other v4: 2226,650 560,829

## Polygon pours and split planes (outlines as drawn)
GND on Top Layer "Bottom Layer-No Net" (solid, remove dead copper, pour order 1000): -262,1422 3062,1422 3205,1565 3222,1548 3222,-78 -46,-78 -227,-259
GND on Bottom Layer "Bottom Layer-No Net" (solid, remove dead copper, pour order 1001): -258,1497 -252,1503 3240,1503 3240,-249 3233,-242 -85,-242

## Keep-outs
Keep-Out Layer:
  lines w3.94: 82.68,209.57 401.57,209.57 401.57,745 83,745
  lines w4: 82.68,209.57 82.68,185 0,185 0,0 3000,0 3000,1400 0,1400 0,1044.52 0,772 83,772 83,745

## Other copper
Top Layer:
  rectangle net GND: 520,1167 589,1197
  pour cut-out: 592.72,1197.74 593,1198.02 593,1400 0,1400 0,1197.02
  pour cut-out: 3000,1400 3000,957 2809,957 2707,855 2495,855 2495,762 2463,730 2463,729 2072,729 2072,781 2281,990 2281,1043 2213,1111 2105,1111 2022,1194 2022,1400
Bottom Layer:
  pour cut-out: 593.36,1198.36 593.64,1198.64 593,1412 0.64,1412 0.64,1197.64
  pour cut-out: 3000,1400 3000,957 2809,957 2707,855 2495,855 2495,762 2463,730 2463,729 2072,729 2072,781 2281,990 2281,1043 2213,1111 2105,1111 2022,1194 2022,1400

## Silkscreen, mask and mechanical layers (free items; w line width, h text height)
Top Overlay:
  drawing of 887 lines, arcs and shapes, not listed
  text "RST" at 146,1080.45 h70
  text "USB-TTL" at 2806.9,958 h50
  text "WPS" at 146,882.45 h70
  text "PWR" at 2889.18,638 h50
  text "LAN" at 2900.94,509 h50
  text "WLED" at 2866,380 h50
  text "USB HOST" at 2761.13,290 h50
  text "What will you make?" at 1757,140 h70
Bottom Overlay:
  drawing of 352 lines, arcs and shapes, not listed
  text "RXD1" at 670,1293 h60 r90
  text "TXD1" at 770,1293 h60 r90
  text "WLED" at 870,1293 h60 r90
  text "LINK0" at 970,1293 h60 r90
  text "IO42" at 1070,1293 h60 r90
  text "IO41" at 1170,1293 h60 r90
  text "IO40" at 1270,1293 h60 r90
  text "IO39" at 1370,1293 h60 r90
  text "RST" at 1470,1293 h60 r90
  text "WPS" at 1570,1293 h60 r90
  text "GND" at 1670,1293 h60 r90
  text "3V3" at 1770,1293 h60 r90
  text "MCLK" at 1870,1293.12 h60 r90
  text "SDI" at 1970,1293.12 h60 r90
  text "SDO" at 2070,1293.12 h60 r90
  text "LRCK" at 2170,1293 h60 r90
  text "BCLK" at 2270,1293 h60 r90
  text "SCL" at 2370,1293 h60 r90
  text "SDA" at 2470,1293 h60 r90
  text "INPUT" at 2697,1073 h60
  text "UART" at 779,1057.23 h60
  text "LED" at 953,1056.88 h60
  text "GPIO" at 1265,1056.91 h60
  text "KEY" at 1560,1056.88 h60
  text "PWR" at 1770,1056.88 h60
  text "IIS" at 2083,1056.91 h60
  text "IIC" at 2440,1056.91 h60
  text "G" at 2556,1007 h60
  text "L" at 2625,1007 h60
  text "M" at 2719,1007 h60
  text "L" at 2319,855 h60
  text "R" at 2165,852 h60
  text "G" at 2556,826 h60
  text "R" at 2629.25,826 h60
  text "M" at 2719,826 h60
  text "-" at 2098,800 h50
  text "+" at 2176,800 h50
  text "-" at 2254,800 h50
  text "+" at 2332,800 h50
  text "OUTPUT" at 2348,699 h60
  text "Open Source" at 1119,683.2 h70
  text "hardware" at 1062.48,617.2 h70
  text "IO18" at 1270.23,564.29 h60 r90
  text "IO19" at 1369.88,563.82 h60 r90
  text "IO20" at 1469.88,564.52 h60 r90
  text "IO21" at 1569.88,561.19 h60 r90
  text "Widora-NEO" at 1947,518.15 h60
  text "BOARD MODE:" at 2362,518.15 h60
  text "DESIGNED  BY  MANGO" at 2362,448.63 h60
  text "2" at 1470,408.56 h60 r90
  text "3" at 1569.65,407.56 h60 r90
  text "https://widora.io" at 2362,384.74 h60
  text "SPI" at 600,303.68 h60
  text "GPIO" at 1004,303.68 h60
  text "PWM" at 1364,303.65 h60
  text "UART" at 1579,304 h60
  text "TF CARD" at 2112,303.68 h60
  text "RXD2" at 1570,248.39 h60 r90
  text "TXD2" at 1470,238.33 h60 r90
  text "IO17" at 1070,223.82 h60 r90
  text "CMD" at 2170,224.05 h60 r90
  text "IO15" at 870,222.47 h60 r90
  text "IO16" at 970,222.36 h60 r90
  text "GND" at 670,221.48 h60 r90
  text "IO14" at 770,221.48 h60 r90
  text "GND" at 1670,221.36 h60 r90
  text "CLK" at 2070,216.22 h60 r90
  text "CS0" at 470,205.82 h60 r90
  text "CS1" at 170,201.04 h60 r90
  text "IO0" at 1170,192.29 h60 r90
  text "MO" at 370,189.92 h60 r90
  text "CK" at 570,182.29 h60 r90
  text "CD" at 1770,179.36 h60 r90
  text "D0" at 1970,173.98 h60 r90
  text "D2" at 2370,173.92 h60 r90
  text "D3" at 2270,173.39 h60 r90
  text "VF" at 70,170.97 h60 r90
  text "D1" at 1870,170.64 h60 r90
  text "MI" at 270,165.58 h60 r90
  text "0" at 1270,134.14 h60 r90
  text "1" at 1370,127.88 h60 r90
  text "3V3" at 2488,87.93 h50
  text "GND" at 2598,88 h50
  text "GND" at 2699,88 h50
  text "5V" at 2776,88 h50
Top Solder:
  rectangle: 0.64,1197.64 593,1412

## Text inside footprints (layer, text, board x,y; h text height)
C1: Mechanical 15 "1" at 1725.47,1170.71 h29.53 r180
C46: Mechanical 15 "1" at 2584,184 h29.53 r270
C65: Mechanical 15 "1" at 2614.71,364.03 h29.53 r90
C66: Mechanical 15 "1" at 2211.71,364.03 h29.53 r90
C67: Mechanical 15 "1" at 2417.47,1110.71 h29.53 r180
C70: Mechanical 15 "1" at 2330.29,1216.47 h29.53 r270
C71: Mechanical 15 "1" at 2423.29,1216.47 h29.53 r270
J3: Keep-Out Layer "CUT OFF" at 217.13,672.28 h60 r270
M1: Top Overlay "此区域留空" at 1220,697 h60; Top Overlay "不敷铜" at 876,934 h40 r90
M5: Bottom Overlay "94V-0" at 256,1266 h45; Bottom Overlay "R" at 326,1321.5 h25
P4: Top Overlay "1" at 2745,959 h50; Top Overlay "2" at 2743.5,883.5 h50